# Altium PCB PCB4.pcbdoc
Units mm, origin at the board's own origin, x right, y up, seen from the top; angles counter-clockwise.
Board outline 99 x 80 mm, 2 copper layers (Top Layer, Bottom Layer), stack 1.569 mm thick; 16 components, 14 nets, 110 pads, 0 vias.
Unrouted connection lines stored in the file: 30.
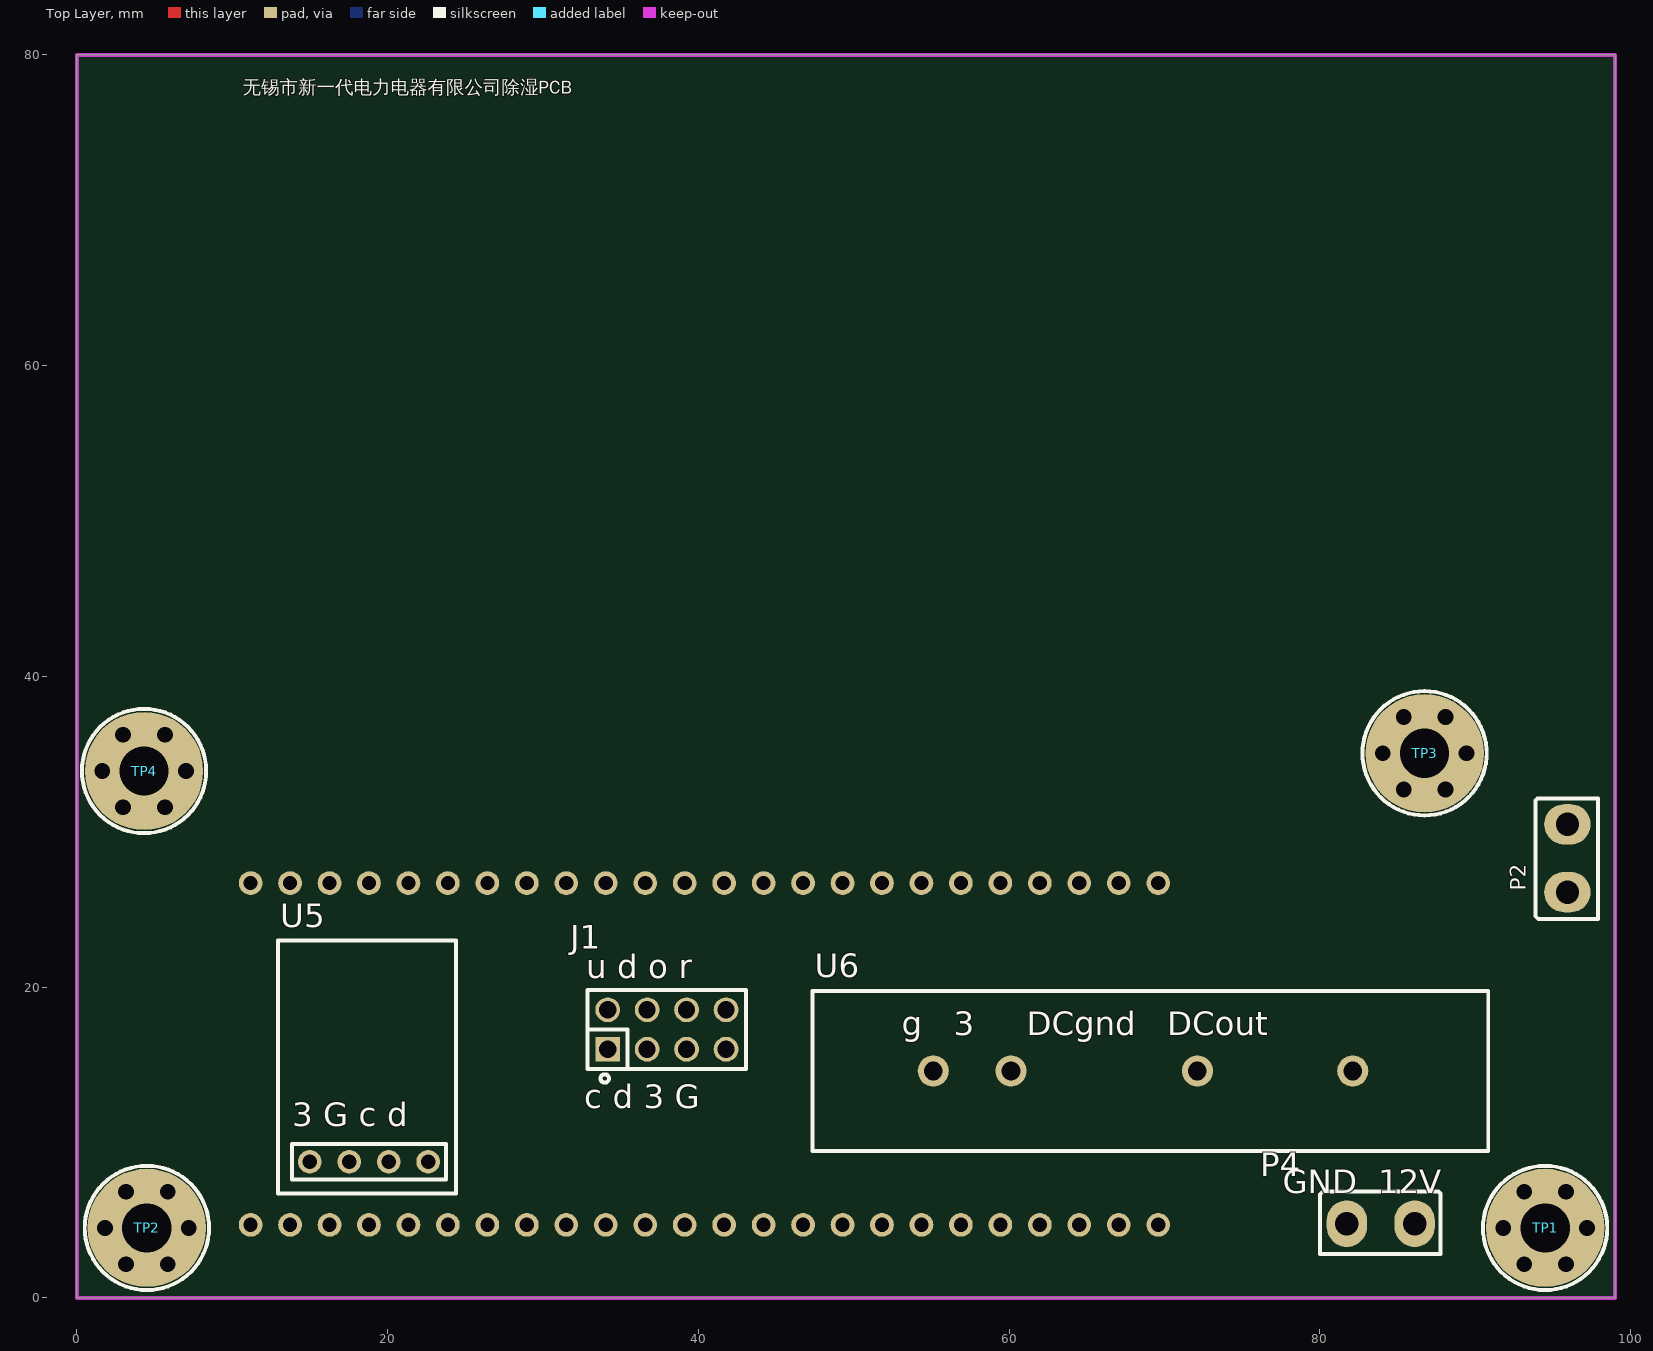
[diagram p0: Top Layer view]
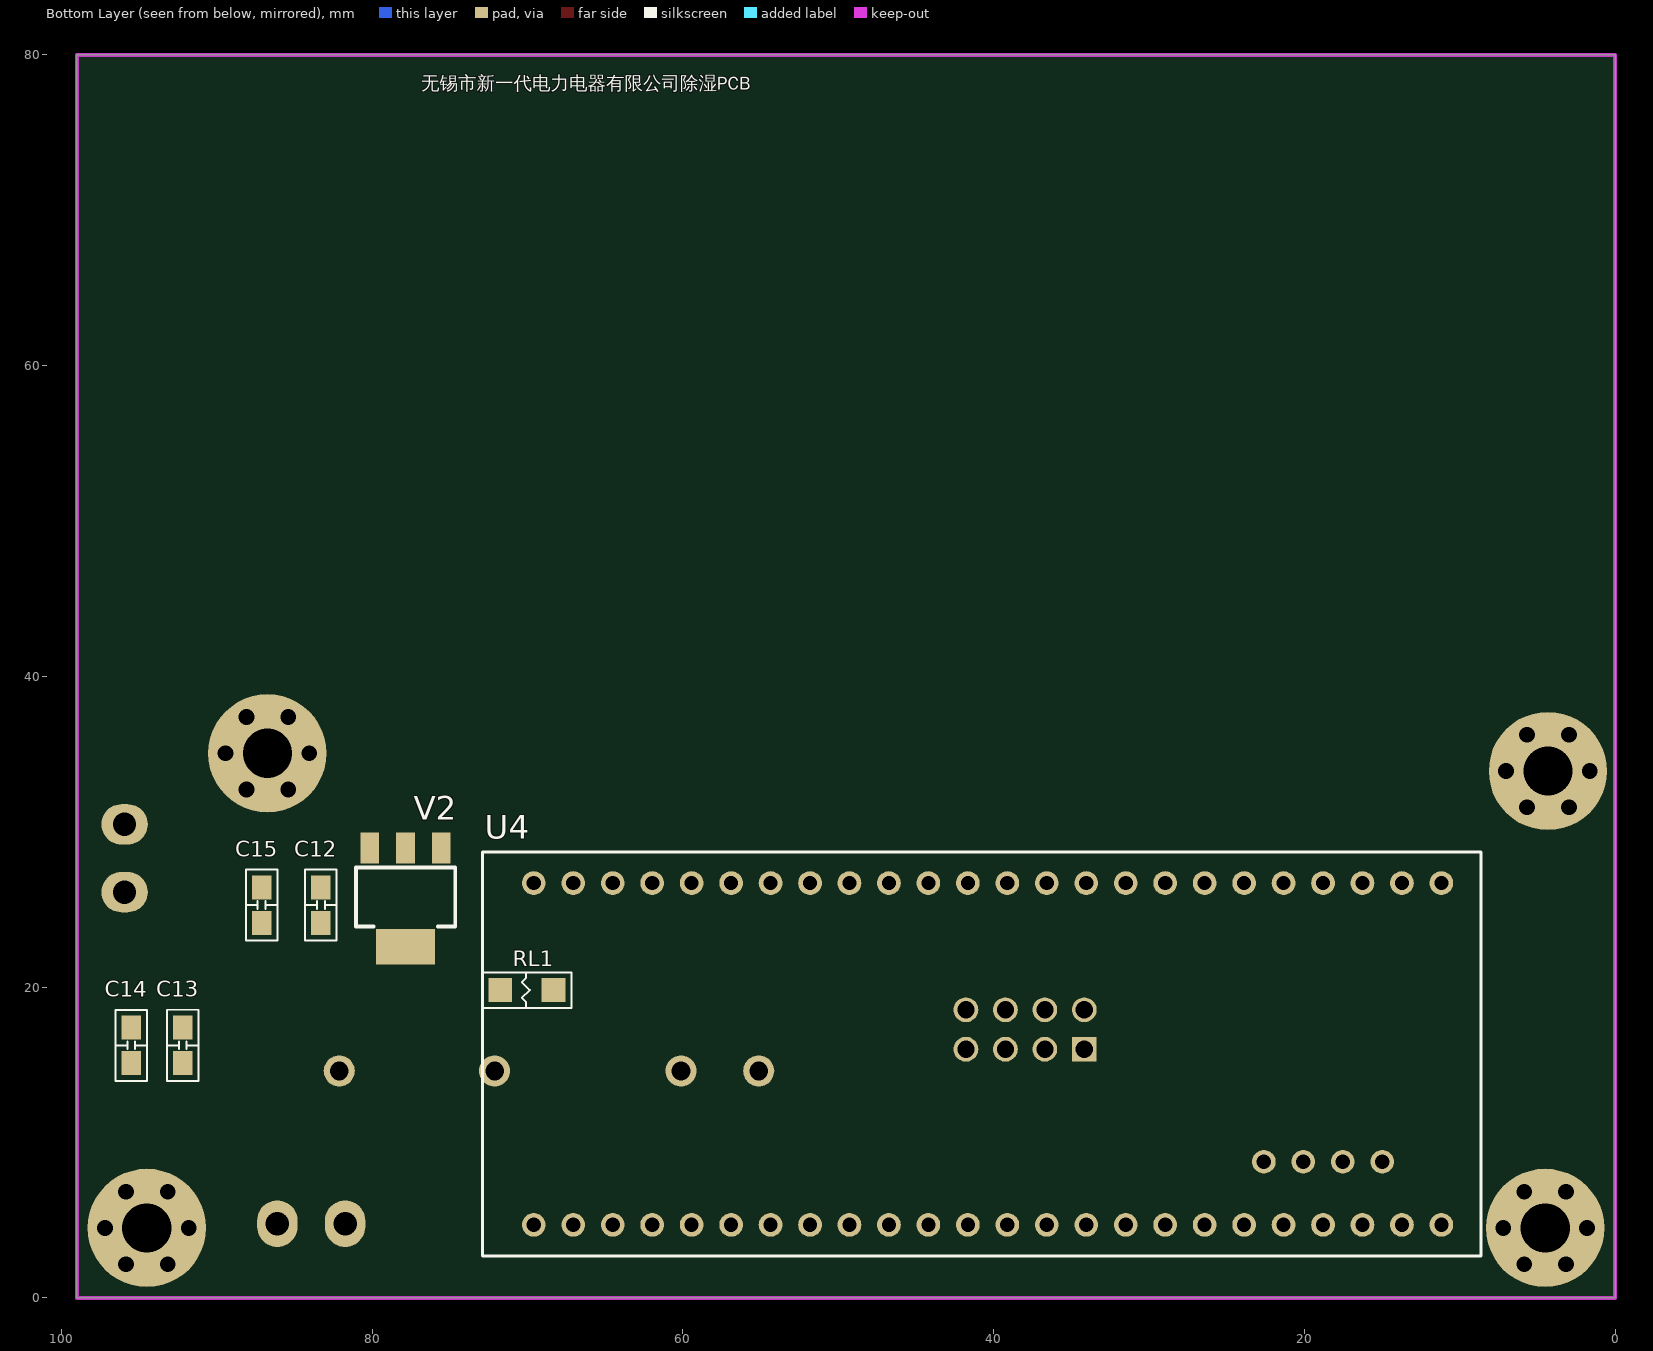
[diagram p1: Bottom Layer view, seen from below]

## Layer stack, top to bottom
Top Solder: solder mask 0.0254, SM-001, Dk 4
Top Layer: signal copper 0.035
Dielectric 1: core 1.4986, Core-043, Dk 4.3
Bottom Layer: signal copper 0.035
Bottom Solder: solder mask 0.0254, SM-001, Dk 4

## Board outline
0,0 0,80 99,80 99,0.001

## Design rules (kind name [scope] priority, off if disabled: settings)
AssemblyTestPointUsage [All] p0: scope1count=1 scope1_0_kind=Board scope1_0_value=Board scope2count=1 scope2_0_kind=Board scope2_0_value=Board commentlength=0
AssemblyTestpoint [All] p0: scope1count=1 scope1_0_kind=Board scope1_0_value=Board scope2count=1 scope2_0_kind=Board scope2_0_value=Board commentlength=0
Clearance [All] p0: scope1count=1 scope1_0_kind=Board scope1_0_value=Board scope2count=1 scope2_0_kind=Board scope2_0_value=Board commentlength=0 gap=0
Clearance Clearance_Polygon [All] p0 off: scope1count=1 scope1_0_kind=Board scope1_0_value=Board scope2count=1 scope2_0_kind=Board scope2_0_value=Board commentlength=48 gap=0.254 // Protel DXP Scope 1 Expression Was: InPolygon
Clearance Clearance_Polygon [InPolygon] p1: gap=0.254 ignorepadtopadclearanceinfootprint=TRUE
Clearance [All] p2: gap=0 ignorepadtopadclearanceinfootprint=TRUE
ComponentClearance [All] p0: scope1count=1 scope1_0_kind=Board scope1_0_value=Board scope2count=1 scope2_0_kind=Board scope2_0_value=Board commentlength=0 gap=0.025 collisioncheckmode=3
ComponentClearance [All] p1: gap=0.025 collisioncheckmode=3 verticalgap=2540 showdistances=FALSE donotcheckwithout3dbody=TRUE
DiffPairsRouting [All] p0: scope1count=1 scope1_0_kind=Board scope1_0_value=Board scope2count=1 scope2_0_kind=Board scope2_0_value=Board commentlength=0
FabricationTestPointUsage [All] p0: scope1count=1 scope1_0_kind=Board scope1_0_value=Board scope2count=1 scope2_0_kind=Board scope2_0_value=Board commentlength=0 valid=0 allowmultiple=FALSE
FabricationTestpoint [All] p0: scope1count=1 scope1_0_kind=Board scope1_0_value=Board scope2count=1 scope2_0_kind=Board scope2_0_value=Board commentlength=0 side=3 testpointundercomponent=TRUE minsize=1.016 maxsize=2.54 preferedsize=1.524 minholesize=0 maxholesize=1.016 preferedholesize=0.813 testpointgrid=0.025
FanoutControl Fanout_Default [All] p0: scope1count=1 scope1_0_kind=Board scope1_0_value=Board scope2count=1 scope2_0_kind=Board scope2_0_value=Board commentlength=30 // Fanout_Default (Default Rule)
FanoutControl Fanout_Small [All] p0 off: scope1count=1 scope1_0_kind=Board scope1_0_value=Board scope2count=1 scope2_0_kind=Board scope2_0_value=Board commentlength=84 // Protel DXP Scope 1 Expression Was: (CompPinCount < 5)   Fanout_Small (Default Rule)
FanoutControl Fanout_SOIC [All] p0 off: scope1count=1 scope1_0_kind=Board scope1_0_value=Board scope2count=1 scope2_0_kind=Board scope2_0_value=Board commentlength=71 // Protel DXP Scope 1 Expression Was: IsSOIC   Fanout_SOIC (Default Rule)
FanoutControl Fanout_LCC [All] p0 off: scope1count=1 scope1_0_kind=Board scope1_0_value=Board scope2count=1 scope2_0_kind=Board scope2_0_value=Board commentlength=69 // Protel DXP Scope 1 Expression Was: IsLCC   Fanout_LCC (Default Rule)
FanoutControl Fanout_BGA [All] p0 off: scope1count=1 scope1_0_kind=Board scope1_0_value=Board scope2count=1 scope2_0_kind=Board scope2_0_value=Board commentlength=69 // Protel DXP Scope 1 Expression Was: IsBGA   Fanout_BGA (Default Rule)
Height [All] p0: scope1count=1 scope1_0_kind=Board scope1_0_value=Board scope2count=1 scope2_0_kind=Board scope2_0_value=Board commentlength=0
Height [All] p1: minheight=0 maxheight=80 prefheight=12.7
HoleSize [All] p0: scope1count=1 scope1_0_kind=Board scope1_0_value=Board scope2count=1 scope2_0_kind=Board scope2_0_value=Board commentlength=0 absolutevalues=TRUE maxlimit=5.08 minlimit=0.025 maxpercent=80.000 minpercent=20.000
HoleSize [All] p1: absolutevalues=TRUE maxlimit=5.08 minlimit=0.025 maxpercent=80.000 minpercent=20.000
HoleToHoleClearance [All] p0: scope1count=1 scope1_0_kind=Board scope1_0_value=Board scope2count=1 scope2_0_kind=Board scope2_0_value=Board commentlength=0
LayerPairs [All] p0: scope1count=1 scope1_0_kind=Board scope1_0_value=Board scope2count=1 scope2_0_kind=Board scope2_0_value=Board commentlength=0 enforce=TRUE
MinimumSolderMaskSliver [All] p0: scope1count=1 scope1_0_kind=Board scope1_0_value=Board scope2count=1 scope2_0_kind=Board scope2_0_value=Board commentlength=0
NetAntennae [All] p0: scope1count=1 scope1_0_kind=Board scope1_0_value=Board scope2count=1 scope2_0_kind=Board scope2_0_value=Board commentlength=0
PasteMaskExpansion [All] p0: scope1count=1 scope1_0_kind=Board scope1_0_value=Board scope2count=1 scope2_0_kind=Board scope2_0_value=Board commentlength=0 expansion=0
PlaneClearance [All] p0: scope1count=1 scope1_0_kind=Board scope1_0_value=Board scope2count=1 scope2_0_kind=Board scope2_0_value=Board commentlength=0 clearance=0.508
PlaneConnect [All] p0: scope1count=1 scope1_0_kind=Board scope1_0_value=Board scope2count=1 scope2_0_kind=Board scope2_0_value=Board commentlength=0 planeconnectstyle=Relief reliefexpansion=0.508 reliefentries=4 reliefconductorwidth=0.254 reliefairgap=0.254
PolygonConnect [All] p0: scope1count=1 scope1_0_kind=Board scope1_0_value=Board scope2count=1 scope2_0_kind=Board scope2_0_value=Board commentlength=0 connectstyle=Direct reliefconductorwidth=1.397 reliefentries=4 polygonreliefangle="90 Angle"
PolygonConnect [All] p1: connectstyle=Direct reliefconductorwidth=1.397 reliefentries=4 polygonreliefangle="90 Angle" airgapwidth=0
RoutingCorners [All] p0: scope1count=1 scope1_0_kind=Board scope1_0_value=Board scope2count=1 scope2_0_kind=Board scope2_0_value=Board commentlength=0 cornerstyle=45-Degree minsetback=2.54 maxsetback=2.54
RoutingLayers [All] p0: scope1count=1 scope1_0_kind=Board scope1_0_value=Board scope2count=1 scope2_0_kind=Board scope2_0_value=Board commentlength=0 top layer=Automatic bottom layer=Automatic
RoutingPriority [All] p0: scope1count=1 scope1_0_kind=Board scope1_0_value=Board scope2count=1 scope2_0_kind=Board scope2_0_value=Board commentlength=0
RoutingTopology [All] p0: scope1count=1 scope1_0_kind=Board scope1_0_value=Board scope2count=1 scope2_0_kind=Board scope2_0_value=Board commentlength=0 topology=Shortest
RoutingVias [All] p0: scope1count=1 scope1_0_kind=Board scope1_0_value=Board scope2count=1 scope2_0_kind=Board scope2_0_value=Board commentlength=0 holewidth=0.711 width=1.27 viastyle="Through Hole" minholewidth=0.711 minwidth=1.27 maxholewidth=0.711 maxwidth=1.27
RoutingVias [All] p1: holewidth=0.711 width=1.27 viastyle="Through Hole" minholewidth=0.711 minwidth=1.27 maxholewidth=0.711 maxwidth=1.27
ShortCircuit [All] p0: scope1count=1 scope1_0_kind=Board scope1_0_value=Board scope2count=1 scope2_0_kind=Board scope2_0_value=Board commentlength=0 allowed=FALSE
SilkToBoardRegionClearance [All] p0: scope1count=1 scope1_0_kind=Board scope1_0_value=Board scope2count=1 scope2_0_kind=Board scope2_0_value=Board commentlength=0
SilkToSilkClearance [All] p0: scope1count=1 scope1_0_kind=Board scope1_0_value=Board scope2count=1 scope2_0_kind=Board scope2_0_value=Board commentlength=0
SilkToSilkClearance [All] p1: silktosilkclearance=0
SilkToSolderMaskClearance [All] p0 off: scope1count=1 scope1_0_kind=Board scope1_0_value=Board scope2count=1 scope2_0_kind=Board scope2_0_value=Board commentlength=44 // Protel DXP Scope 1 Expression Was: IsPad
SilkToSolderMaskClearance [IsPad] p1: minsilkscreentomaskgap=0 clearancetoexposedcopper=TRUE
SolderMaskExpansion [All] p0: scope1count=1 scope1_0_kind=Board scope1_0_value=Board scope2count=1 scope2_0_kind=Board scope2_0_value=Board commentlength=0 expansion=0.102
SolderMaskExpansion [All] p1: expansion=0.102 istentingtop=FALSE
UnRoutedNet [All] p0: scope1count=1 scope1_0_kind=Board scope1_0_value=Board scope2count=1 scope2_0_kind=Board scope2_0_value=Board commentlength=0
UnpouredPolygon [All] p0: scope1count=1 scope1_0_kind=Board scope1_0_value=Board scope2count=1 scope2_0_kind=Board scope2_0_value=Board commentlength=0
UnpouredPolygon [All] p1: allowunpoured=TRUE
Width [All] p0: scope1count=1 scope1_0_kind=Board scope1_0_value=Board scope2count=1 scope2_0_kind=Board scope2_0_value=Board commentlength=0 maxlimit=3.81 minlimit=0.254 preferedwidth=0.254
Width [All] p1: maxlimit=3.81 minlimit=0.254 preferedwidth=0.254 minimp=50.000000 maximp=50.000000 favimp=50.000000
24 further rules are at their usual default settings.

## Components (designator, comment, footprint, x,y, rotation, side; value= is the part's Value field where it differs from the comment)
C12 "10uF" 0805-C 83.289,24.13 r90 bottom
C13 "10uF" 0805-C 92.179,15.113 r90 bottom
C14 "0.1uF" 0805-C 95.492,15.111 r90 bottom
C15 "0.1uF" 0805-C 87.099,24.13 r90 bottom
J1 "" HDR-TH_8P-P2.54-V-F-R2-C4-S2.54-1 37.973,17.272 r0 top
P2 "12V5A" OUT#1 95.885,30.48 r0 top
P4 "12VFAN" OUT#2 86.106,4.826 r270 top
RL1 "" 1206-R 68.324,19.823 r0 bottom
TP1 "" M3x8+6_N 94.5,4.5 r0 top
TP2 "" M3x8+6_N 4.5,4.5 r0 top
TP3 "" M3x8+6_N 86.741,35.052 r0 top
TP4 "" M3x8+6_N 4.318,33.909 r0 top
U4 "W806核心板" w806 40.386,15.699 r270 bottom
U5 "" AHT10 15.113,17.653 r90 top
U6 "" RELAY-TH_4P-L43.5-W10.3-PMN 69.088,14.605 r0 top
V2 "AMS1117-3V3" PG-SOT223-4_L6.5-W3.5-P2.30-LS7.0-BR 77.851,25.781 r90 bottom

## Footprints (in the part's own frame and the unit in brackets; to place one, negate y for a bottom-side part, rotate by r counter-clockwise, add the part's x,y. Pads: shape width x height; smd on the part's side, far side on the other; paste and mask are expansions set on the pad)
0805-C [mil]
  rect 60x50 smd mask+0: 1(0.08,0.45) 2(90.08,0.45)
  silkscreen extent -45,-40 135,40
1206-R [mil]
  rect 60x60 smd: 1(0.08,0.45) 2(135.08,0.45)
  silkscreen extent -45,-45 180,45
AHT10 [mil]
  round 60 hole 36 mask+0: 1(-350,5) 2(-350,-95) 3(-350,-195) 4(-350,-295)
  silkscreen extent -430,-365 210,85
HDR-TH_8P-P2.54-V-F-R2-C4-S2.54-1 [mil]
  rect 63x63 hole 43.3 mask+0: 1(-150,-50)
  round 63 hole 43.3 mask+0: 2(-150,50) 3(-50,-50) 4(-50,50) 5(50,-50) 6(50,50) 7(150,-50) 8(150,50)
  silkscreen extent -201,-135 201,100
M3x8+6_N [mil] "M3铜柱，长：8mm，螺纹长：6mm"
  round 40 hole 40: 1(-106,0) 1(-53,-91.8) 1(-53,91.8) 1(53,-91.8) 1(53,91.8) 1(106,0)
  round 300 hole 125: 1(0,0)
  silkscreen extent -157,-157 157,157
OUT#1 [mm]
  oval 3x2.6 hole 1.5 mask+0.051: GND(0.051,-4.369) VCC(0.051,0)
  silkscreen extent -2.01,-6.1 2.01,1.65
OUT#2 [mm]
  oval 3x2.6 hole 1.5 mask+0: GND(0.051,-4.369) VCC(0.051,0)
  silkscreen extent -2.01,-6.1 2.01,1.65
PG-SOT223-4_L6.5-W3.5-P2.30-LS7.0-BR [mm]
  rect 2x1.2 smd mask+0: 1(3.175,-2.3) 2(3.175,0) 3(3.175,2.3)
  rect 2.3x3.8 smd mask+0: 4(-3.175,0)
  silkscreen extent -1.87,-3.2 1.93,3.2
RELAY-TH_4P-L43.5-W10.3-PMN [mm]
  round 2 hole 1.2 mask+0: 1(13.03,0) 2(3.03,0) 3(-8.97,0) 4(-13.97,0)
  silkscreen extent -21.75,-5.15 21.75,5.15
w806 [mil]
  round 60 hole 36 mask+0: 1(-433.08,1150) 2(-433.08,1050) 3(-433.08,950) 4(-433.08,850) 5(-433.08,750) 6(-433.08,650) 7(-433.08,550) 8(-433.08,450) 9(-433.08,350) 10(-433.08,250) 11(-433.08,150) 12(-433.08,50) 13(-433.08,-50) 14(-433.08,-150) 15(-433.08,-250) 16(-433.08,-350) 17(-433.08,-450) 18(-433.08,-550) 19(-433.08,-650) 20(-433.08,-750) 21(-433.08,-850) 22(-433.08,-950) 23(-433.08,-1050) 24(-433.08,-1150) 25(433.08,-1150) 26(433.08,-1050) 27(433.08,-950) 28(433.08,-850) 29(433.08,-750) 30(433.08,-650) 31(433.08,-550) 32(433.08,-450) 33(433.08,-350) 34(433.08,-250) 35(433.08,-150) 36(433.08,-50) 37(433.08,50) 38(433.08,150) 39(433.08,250) 40(433.08,350) 41(433.08,450) 42(433.08,550) 43(433.08,650) 44(433.08,750) 45(433.08,850) 46(433.08,950) 47(433.08,1050) 48(433.08,1150)
  silkscreen extent -512,-1280 512,1250

## Part data
C12 C13 C14 C15: library part CAP-SMT
J1: library part 2.54mm,2×4Doublerowfemale
P2: library part "Header 2", "Header, 2-Pin"
P4: library part 12V5A
RL1: library part Res1, "Resistor"
TP1 TP2 TP3 TP4: library part M3
U5: library part AHT10温湿度传感器
U6: library part PMN5D6132_ENMG
V2: library part AMS1117

## Nets (pads, with @x,y where several pads share a name; then routed paths per layer and width w, separated by ;. In a path a pad name is that pad's centre, name@x,y a point inside that pad or via, vN(x,y) a via of type N, cw(c..) or ccw(c..) an arc to the next point about the centre after c; other vN are vias at no path point)
3.3V: C13.2 C14.2 J1.5 U4.1 U5.1 V2.2
CLK: J1.1 U4.3
DIO: J1.3 U4.6
DOWN: J1.4 U4.13
GND: C12.1 C13.1 C14.1 C15.1 J1.7 P2.GND RL1.1 U4.24 U5.2 U6.4 V2.1
NetP4_GND: P4.GND U6.2
NetP4_VCC: P4.VCC U6.1
NetU4_4: U4.4 U5.3
NetU4_5: U4.5 U5.4
NetU4_7: U4.7 U6.3
OK: J1.6 U4.14
RST: J1.8 U4.48
UP: J1.2 U4.12
VCC: C12.2 C15.2 P2.VCC RL1.2 V2.3
pads on no net: TP1.1 TP2.1 TP3.1 TP4.1 U4.2 U4.8 U4.9 U4.10 U4.11 U4.15 U4.16 U4.17 U4.18 U4.19 U4.20 U4.21 U4.22 U4.23 U4.25 U4.26 U4.27 U4.28 U4.29 U4.30 U4.31 U4.32 U4.33 U4.34 U4.35 U4.36 U4.37 U4.38 U4.39 U4.40 U4.41 U4.42 U4.43 U4.44 U4.45 U4.46 U4.47 V2.4

## Keep-outs
Keep-Out Layer:
  the board outline again, w0.254

## Silkscreen, mask and mechanical layers (free items; w line width, h text height)
Top Overlay:
  text "无锡市新一代电力电器有限公司除湿PCB" at 10.668,77.216 h1.5
  text "u d o r" at 32.766,20.574 h1.52
  text "g   3     DCgnd   DCout" at 53.086,16.891 h1.52
  text "c d 3 G" at 32.639,12.192 h1.52
  text "3 G c d" at 13.843,11.049 h1.52
  text "GND  12V" at 77.597,6.731 h1.52
Bottom Overlay:
  text "无锡市新一代电力电器有限公司除湿PCB" at 76.835,77.47 h1.5

## Text inside footprints (layer, text, board x,y; h text height)
TP1: Mechanical 13 "3.3K/1206" at 64.831,18.871 h1 r270